# Altium PCB cjb.PcbDoc (part 1 of 2)
Units mil, origin at the board's own origin, x right, y up, seen from the top; angles counter-clockwise.
Board outline 3937.01 x 3672.01 mil, 2 copper layers (Top Layer, Bottom Layer), stack 62.8 mil thick; 137 components, 97 nets, 411 pads, 153 vias.
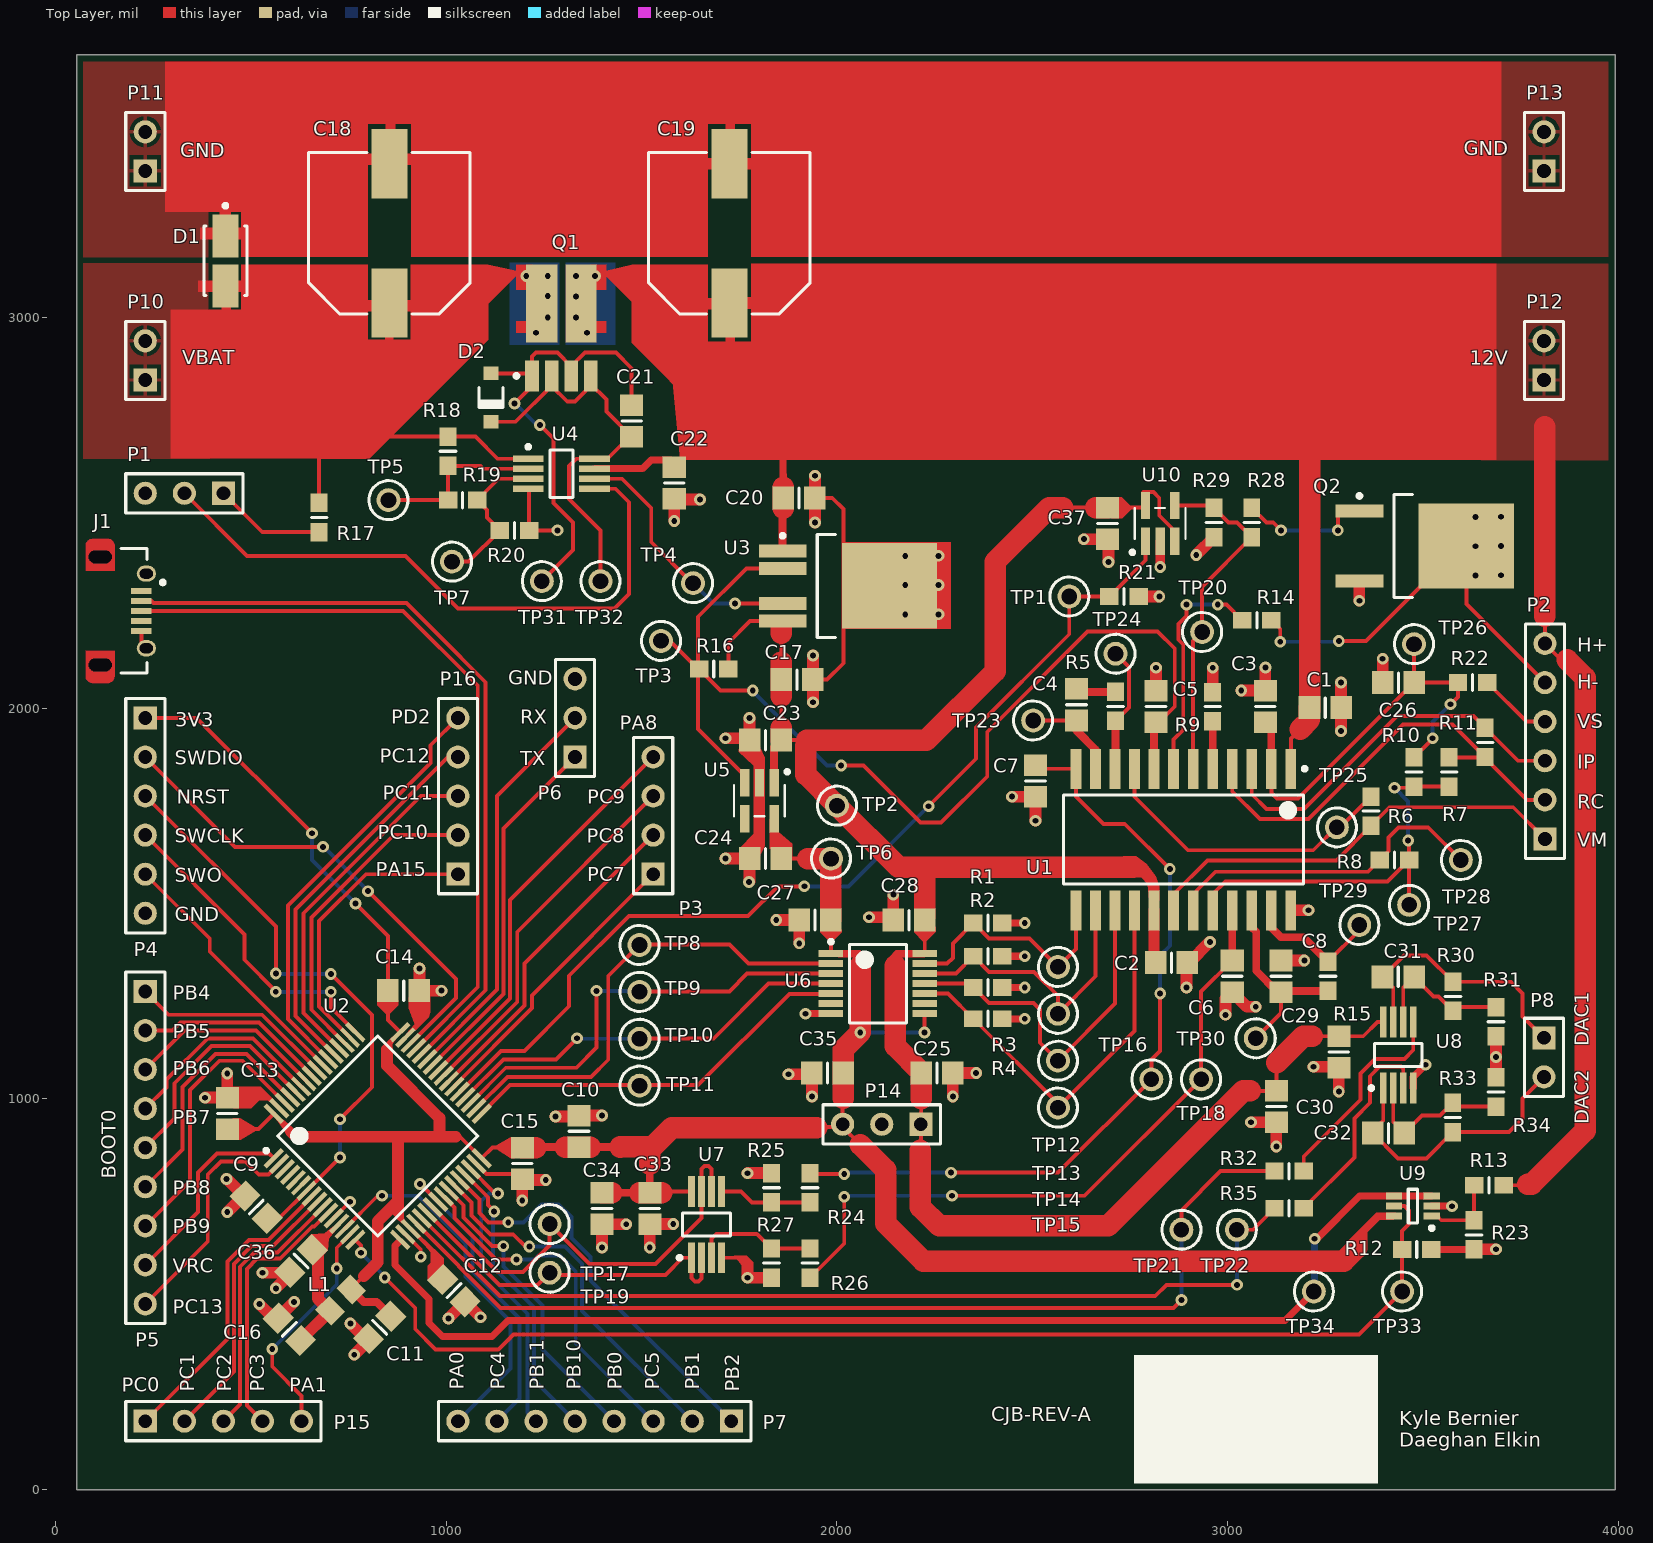
[diagram p0: Top Layer view]
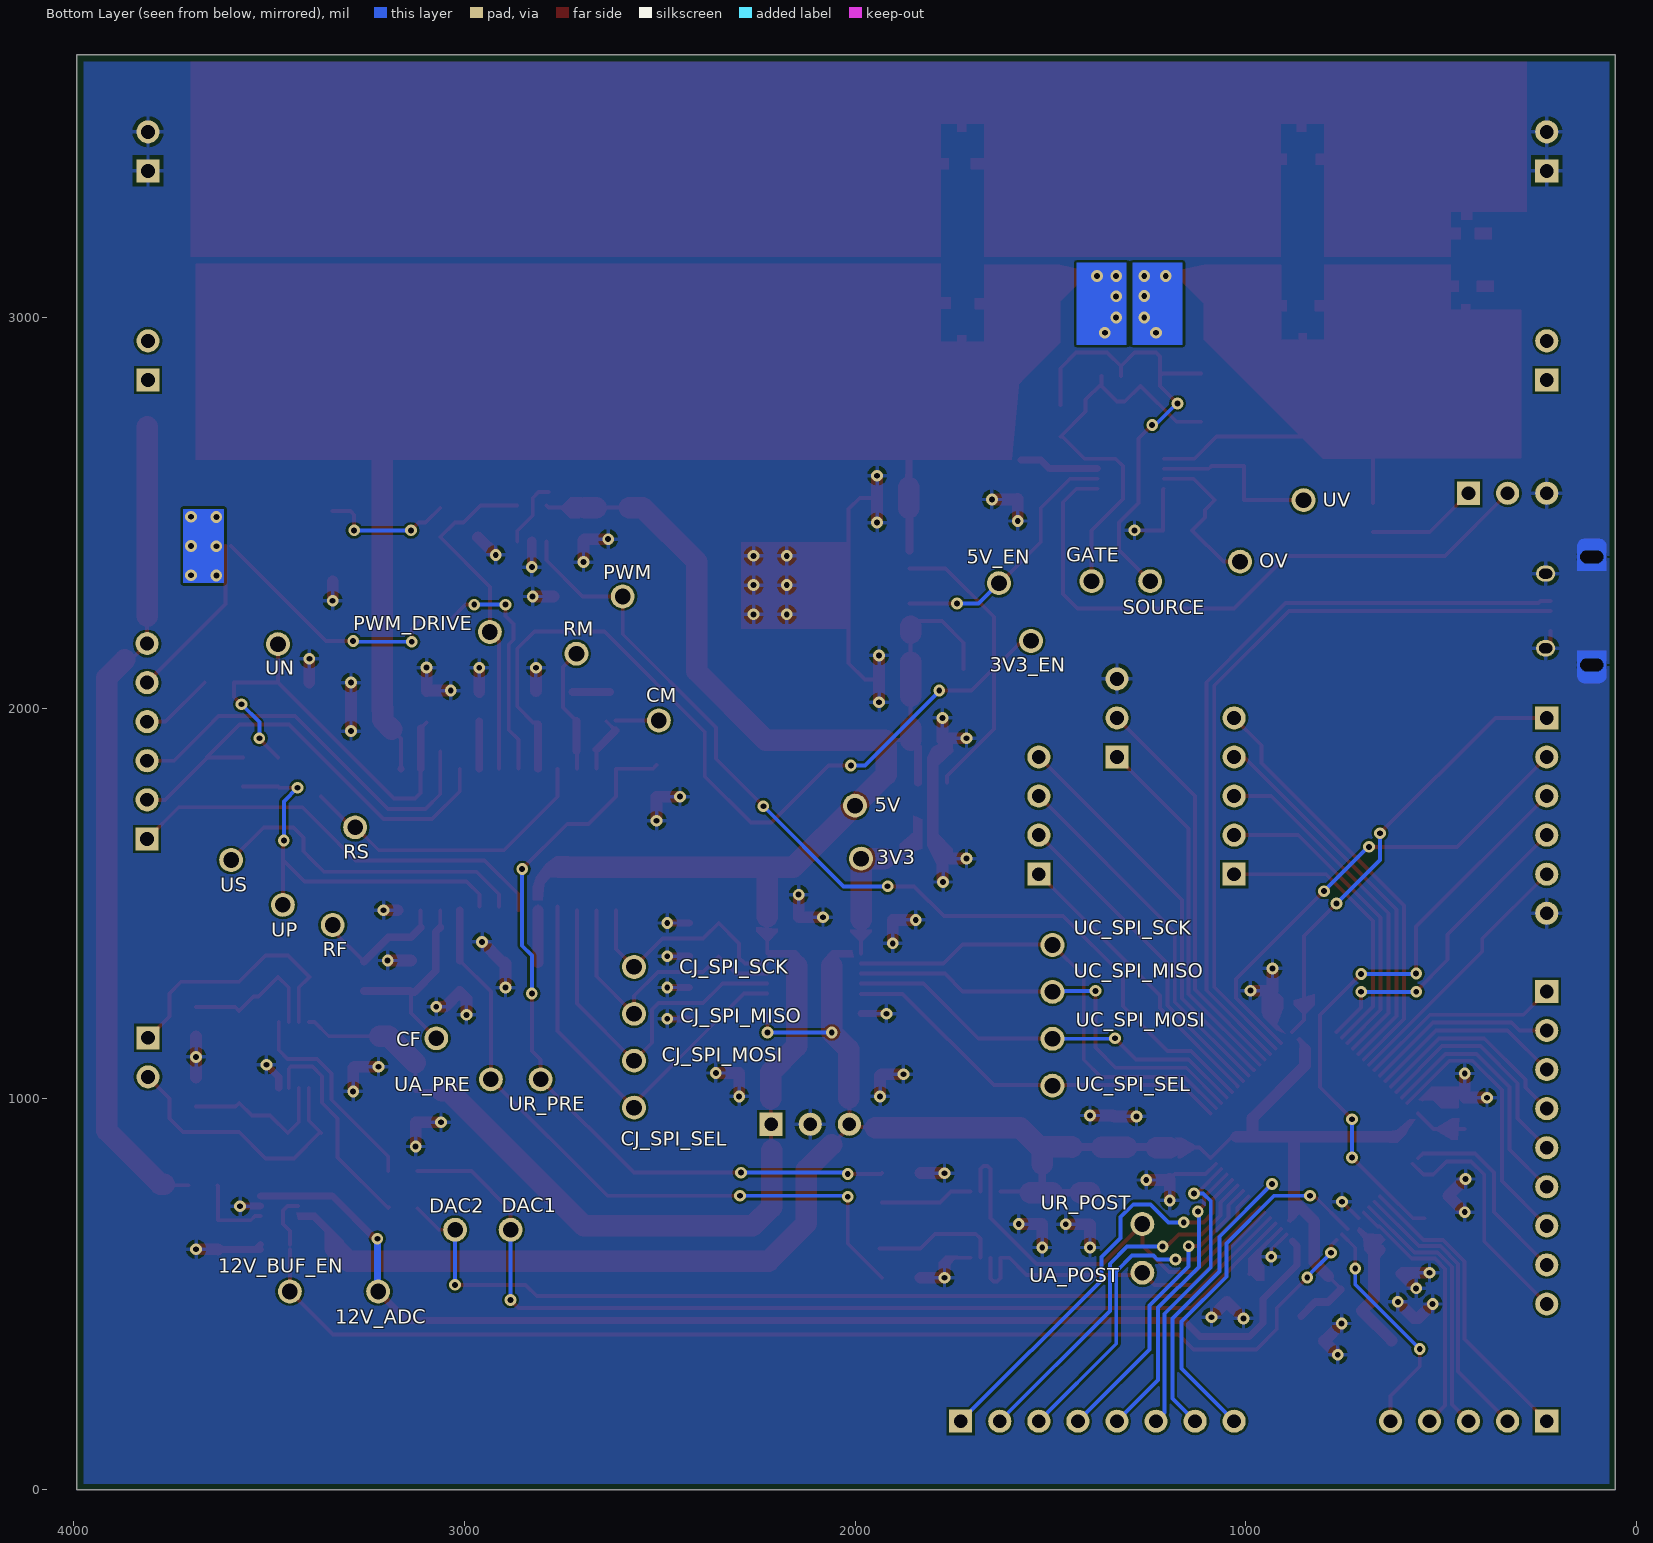
[diagram p1: Bottom Layer view, seen from below]

## Layer stack, top to bottom
Top Solder: solder mask 1, Solder Resist, Dk 3.5
Top Layer: signal copper 1.4
Dielectric 1: core 60, FR4, Dk 4.6
Bottom Layer: signal copper 1.4
Bottom Solder: solder mask 1, Solder Resist, Dk 3.5

## Board outline
55,0 55,3672.01 3992.01,3672.01 3992.01,0

## Design rules (kind name [scope] priority, off if disabled: settings)
BoardOutlineClearance [All] p1: gap=15 ignorepadtopadclearanceinfootprint=FALSE
Clearance [All] p1: gap=6 ignorepadtopadclearanceinfootprint=FALSE
DiffPairsRouting [All] p1: maxlimit=10 minlimit=10 mostfreqgap=10 toplayer_minwidth=10 toplayer_maxwidth=15 toplayer_prefwidth=10 bottomlayer_minwidth=10 bottomlayer_maxwidth=15 bottomlayer_prefwidth=10 maxuncoupledlength=500
HoleSize [All] p1: absolutevalues=TRUE maxlimit=100 minlimit=10 maxpercent=80.000 minpercent=20.000
MinimumAnnularRing [All] p1: minimumring=5
MinimumSolderMaskSliver [All] p1: minsoldermaskwidth=4
PlaneConnect [All] p1: planeconnectstyle=Direct reliefexpansion=20 reliefentries=4 reliefconductorwidth=10 reliefairgap=10
PolygonConnect [All] p1: connectstyle=Relief reliefconductorwidth=10 reliefentries=4 polygonreliefangle="90 Angle" airgapwidth=10
RoutingVias [All] p1: holewidth=6 width=16 viastyle="Through Hole" minholewidth=6 minwidth=16 maxholewidth=28 maxwidth=50
SilkToSolderMaskClearance [IsPad] p1: minsilkscreentomaskgap=6 clearancetoexposedcopper=TRUE
SolderMaskExpansion [All] p1: expansion=3
Width [All] p1: maxlimit=100 minlimit=6 preferedwidth=10 minimp=50.000000 maximp=50.000000 favimp=50.000000
25 further rules are at their usual default settings.

## Classes and differential pairs
component class U_heater: C37 Q2 R21 R28 R29 TP1 TP20 U10
net class PC[0..13]: PC0 PC1 PC2 PC3 PC4 PC5 PC7 PC8 PC9 PC10 PC11 PC12 PC13
net class PB[0..11]: PB0 PB1 PB2 PB3 PB4 PB5 PB6 PB7 PB8 PB9 PB10 PB11
net class PA[0..15]: PA0 PA1 PA4 PA5 PA8 PA13 PA14 PA15
component class U_breakout: C25 C29 C30 C31 C32 C35 P2 P3 P4 P5 P6 P7 P8 P10 P11 P12 P13 P14 P15 P16 R30 R31 R32 R33 R34 R35 TP21 TP22 U8
component class U_power: C17 C18 C19 C20 C21 C22 C23 C24 D1 D2 P1 Q1 R12 R13 R16 R17 R18 R19 R20 R23 TP2 TP3 TP4 TP5 TP6 TP7 TP31 TP32 TP33 TP34 U3 U4 U5 U9
component class U_microcontroller: C9 C10 C11 C12 C13 C14 C15 C16 C36 L1 U2
component class U_cj125: C1 C2 C3 C4 C5 C6 C7 C8 C26 C27 C28 C33 C34 R1 R2 R3 R4 R5 R6 R7 R8 R9 R10 R11 R14 R15 R22 R24 R25 R26 R27 TP8 TP9 TP10 TP11 TP12 TP13 TP14 TP15 TP16 TP17 TP18 TP19 TP23 TP24 TP25 TP26 TP27 TP28 TP29 TP30 U1 U6 U7
differential pair USB_D: +USB_D_P -USB_D_N

## Components (designator, comment, footprint, x,y, rotation, side; value= is the part's Value field where it differs from the comment)
C1 "Generic 0805 Capacitor" 0805 3250.13,2001.4 r180 top
C2 "Generic 0805 Capacitor" 0805 2857.06,1348.8 r0 top
C3 "Generic 0805 Capacitor" 0805 3096.71,2003.8 r90 top
C4 "Generic 0805 Capacitor" 0805 2613.33,2008.8 r90 top
C5 "Generic 0805 Capacitor" 0805 2817.06,2003.8 r90 top
C6 "Generic 0805 Capacitor" 0805 3012.06,1313.8 r90 top
C7 "Generic 0805 Capacitor" 0805 2508.33,1813.8 r90 top
C8 "Generic 0805 Capacitor" 0805 3137.06,1313.8 r270 top
C9 "Generic 0805 Capacitor" 0805 514,723 r315 top value=.1u
C10 "Generic 0805 Capacitor" 0805 1340,917 r270 top value=4.7u
C11 "Generic 0805 Capacitor" 0805 830,415 r45 top value=1u
C12 "Generic 0805 Capacitor" 0805 1020,509 r135 top value=100n
C13 "Generic 0805 Capacitor" 0805 440,963 r270 top value=100n
C14 "Generic 0805 Capacitor" 0805 891.49,1277 r180 top value=100n
C15 "Generic 0805 Capacitor" 0805 1195,835 r90 top value=100n
C16 "Generic 0805 Capacitor" 0805 598.74,410 r315 top value=100n
C17 "Generic 0805 Capacitor" 0805 1898.57,2073 r0 top
C18 "Generic Electrolytic Capacitor" NIC-UUX2A470MNL1GS_M 855,3215 r90 top
C19 "Generic Electrolytic Capacitor" NIC-UUX2A470MNL1GS_M 1725,3215 r90 top
C20 "Generic 0805 Capacitor" 0805 1903.57,2538 r180 top
C21 "Generic 0805 Capacitor" 0805 1475,2735 r90 top
C22 "Generic 0805 Capacitor" 0805 1584,2576 r90 top
C23 "Generic 0805 Capacitor" 0805 1817,1918 r0 top
C24 "Generic 0805 Capacitor" 0805 1817,1615 r0 top
C25 "Generic 0805 Capacitor" 0805 2256.57,1066.26 r180 top
C26 "Generic 0805 Capacitor" 0805 3437.33,2065.4 r180 top
C27 "Generic 0805 Capacitor" 0805 1943.92,1458 r0 top
C28 "Generic 0805 Capacitor" 0805 2185,1457.35 r0 top
C29 "Generic 0805 Capacitor" 0805 3285,1120 r90 top
C30 "Generic 0805 Capacitor" 0805 3125,980 r90 top
C31 "Generic 0805 Capacitor" 0805 3436.98,1312.34 r180 top
C32 "Generic 0805 Capacitor" 0805 3411.98,912.34 r180 top
C33 "Generic 0805 Capacitor" 0805 1521.35,719.57 r90 top
C34 "Generic 0805 Capacitor" 0805 1399,719.57 r90 top
C35 "Generic 0805 Capacitor" 0805 1976.57,1066.26 r0 top
C36 "Generic 0805 Capacitor" 0805 628.74,585 r45 top value=10n
C37 "Generic 0805 Capacitor" 0805 2692.61,2472.85 r90 top
D1 "SMAJ58CA" VISH-DO-214AC-2_M 435,3145 r270 top
D2 "BZT52C15T-7" DIOD-SOD123-2_V 1115,2795 r270 top
J1 "ZX62D-B-5PA8" HIRO-ZX62D-B-5PA8_V 173.74,2248.82 r270 top
L1 "MI0805K601R-10" LIRD-MI0805K601R-10-2_V 730,485 r225 top
P1 "Header 3" HDR1X3 430,2550 r180 top
P2 "Header 6" HDR1X6 3812.33,1665.4 r90 top
P3 "Header 4" HDR1X4 1530,1575 r90 top
P4 "Header 6" HDR1X6 230,1975 r270 top
P5 "Header 9" HDR1X9 230,1275 r270 top
P6 "Header 3" HDR1X3 1330,1875 r90 top
P7 "Header 8" HDR1X8 1730,175 r180 top
P8 "Header 2" HDR1X2 3810,1156.26 r270 top
P10 "Header 2" HDR1X2 230,2840 r90 top
P11 "Header 2" HDR1X2 230,3375 r90 top
P12 "Header 2" HDR1X2 3810,2840 r90 top
P13 "Header 2" HDR1X2 3810,3375 r90 top
P14 "Header 3" HDR1X3 2215,935 r180 top
P15 "Header 5" HDR1X5 230,175 r0 top
P16 "Header 5" HDR1X5 1030,1575 r90 top
Q1 "SI7288DP-T1-GE3" VISH-POWERPAKSO-8_A_V 1295,2995.35 r90 top
Q2 "SQD50N10-8M9L_GE3" TO-252AA 3505,2415 r0 top
R1 "Generic 0603 Resistor" 0603 2386.5,1450 r0 top
R2 "Generic 0603 Resistor" 0603 2386.5,1365 r0 top
R3 "Generic 0603 Resistor" 0603 2386.5,1285 r0 top
R4 "Generic 0603 Resistor" 0603 2386.5,1205 r0 top
R5 "Generic 0603 Resistor" 0603 2713.33,2004.64 r270 top
R6 "Generic 0603 Resistor" 0603 3367.33,1736.4 r90 top
R7 "Generic 0603 Resistor" 0603 3567.33,1836.4 r270 top
R8 "Generic 0603 Resistor" 0603 3427.33,1611.4 r180 top
R9 "Generic 0603 Resistor" 0603 2962.06,2003.8 r90 top
R10 "Generic 0603 Resistor" 0603 3477.33,1836.4 r270 top
R11 "Generic 0603 Resistor" 0603 3659.33,1912.4 r270 top
R12 "Generic 0603 Resistor" 0603 3484.33,614.6 r0 top
R13 "Generic 0603 Resistor" 0603 3669.33,778.91 r180 top
R14 "Generic 0603 Resistor" 0603 3075,2225 r180 top
R15 "Generic 0603 Resistor" 0603 3257.06,1313.8 r270 top
R16 "Generic 0603 Resistor" 0603 1685,2100 r0 top
R17 "Generic 0603 Resistor" 0603 675,2487.95 r90 top
R18 "Generic 0603 Resistor" 0603 1004.65,2657.6 r270 top
R19 "Generic 0603 Resistor" 0603 1042.4,2532.4 r0 top
R20 "Generic 0603 Resistor" 0603 1175,2455 r0 top
R21 "Generic 0603 Resistor" 0603 2734.92,2285.84 r180 top
R22 "Generic 0603 Resistor" 0603 3627.33,2065.4 r180 top
R23 "Generic 0603 Resistor" 0603 3630.66,652 r90 top
R24 "Generic 0603 Resistor" 0603 1931.35,772.57 r270 top
R25 "Generic 0603 Resistor" 0603 1832.92,772.57 r270 top
R26 "Generic 0603 Resistor" 0603 1931.35,579.57 r90 top
R27 "Generic 0603 Resistor" 0603 1832.92,579.57 r90 top
R28 "Generic 0603 Resistor" 0603 3062.06,2475 r90 top
R29 "Generic 0603 Resistor" 0603 2965.35,2475 r90 top
R30 "Generic 0603 Resistor" 0603 3576.98,1262.34 r90 top
R31 "Generic 0603 Resistor" 0603 3686.98,1197.34 r90 top
R32 "Generic 0603 Resistor" 0603 3157.6,815 r0 top
R33 "Generic 0603 Resistor" 0603 3576.35,952.34 r270 top
R34 "Generic 0603 Resistor" 0603 3686.98,1017.34 r270 top
R35 "Generic 0603 Resistor" 0603 3157.6,720 r0 top
TP1 "5001" KSTN-5001 2595,2285.84 r0 top
TP2 "5001" KSTN-5001 2000.5,1750.5 r0 top
TP3 "5001" KSTN-5001 1550,2172.06 r0 top
TP4 "5001" KSTN-5001 1632,2320 r0 top
TP5 "5001" KSTN-5001 852.4,2532.4 r0 top
TP6 "5001" KSTN-5001 1985,1615 r0 top
TP7 "5001" KSTN-5001 1015,2375 r0 top
TP8 "5001" KSTN-5001 1495,1393.82 r180 top
TP9 "5001" KSTN-5001 1495,1273.82 r180 top
TP10 "5001" KSTN-5001 1495,1153.82 r270 top
TP11 "5001" KSTN-5001 1495,1033.82 r270 top
TP12 "5001" KSTN-5001 2566,1337.67 r270 top
TP13 "5001" KSTN-5001 2566,1217.67 r270 top
TP14 "5001" KSTN-5001 2566,1097.67 r270 top
TP15 "5001" KSTN-5001 2566,977.67 r270 top
TP16 "5001" KSTN-5001 2805,1050 r90 top
TP17 "5001" KSTN-5001 1265,679.57 r90 top
TP18 "5001" KSTN-5001 2932.4,1050 r90 top
TP19 "5001" KSTN-5001 1265,555 r90 top
TP20 "5001" KSTN-5001 2935,2195 r180 top
TP21 "5001" KSTN-5001 2882,665 r90 top
TP22 "5001" KSTN-5001 3024,665 r90 top
TP23 "5001" KSTN-5001 2502.33,1968.45 r90 top
TP24 "5001" KSTN-5001 2713.33,2139.28 r90 top
TP25 "5001" KSTN-5001 3280,1695 r90 top
TP26 "5001" KSTN-5001 3477.33,2163.8 r90 top
TP27 "5001" KSTN-5001 3464.73,1496.4 r90 top
TP28 "5001" KSTN-5001 3597.33,1611.4 r90 top
TP29 "5001" KSTN-5001 3337.33,1445 r180 top
TP30 "5001" KSTN-5001 3072.06,1155 r90 top
TP31 "5001" KSTN-5001 1245,2325 r90 top
TP32 "5001" KSTN-5001 1395,2325 r90 top
TP33 "5001" KSTN-5001 3446.93,507 r90 top
TP34 "5001" KSTN-5001 3221,507 r90 top
U1 "CJ125" SOIC-24 2887.06,1663.8 r270 top
U2 "STM32L475RCT3" STM-LQFP64_L 825,905 r45 top
U3 "TPS7A6150QKVURQ1" KVU0005A_M 2028.57,2313 r0 top
U4 "LT4367HMS" MSOP8_M 1295,2600 r0 top
U5 "TLV71333PDBVR" DBV5-M 1802,1763 r270 top
U6 "TXB0104PWR" PW0014A_M 2105,1295 r0 top
U7 "MCP6L02T-E/MS" MSOP8_M 1666.35,678.01 r90 top
U8 "MCP6L02T-E/MS" MSOP8_M 3436.98,1112.34 r90 top
U9 "LMV341MG/NOPB" DCK0006A_M 3474.33,725.33 r180 top
U10 "UCC27519DBVT" DBV5-M 2827.61,2472.85 r90 top

## Footprints (in the part's own frame and the unit in brackets; to place one, negate y for a bottom-side part, rotate by r counter-clockwise, add the part's x,y. Pads: shape width x height; smd on the part's side, far side on the other; paste and mask are expansions set on the pad)
0603 [mm] "0603 - Based on VIshey Recommendations"
  rect 1.2x1.1 smd mask+0.1: 1(-0.95,0) 2(0.95,0)
  silkscreen extent 0,-0.51 0,0.51, body extent -0.8,-0.4 0.8,0.4, height 0.76
0805 [mm] "0805 - Based on VIshey Recommendations"
  rect 1.4x1.5 smd mask+0.1: 1(-1.025,0) 2(1.025,0)
  silkscreen extent 0,-0.64 0,0.64, body extent -1,-0.63 1,0.63, height 1.02
DBV5-M [mil]
  rect 70x24 smd paste+0 mask+2: 1(-46,37.4) 2(-46,0) 3(-46,-37.4) 4(46,-37.4) 5(46,37.4)
  silkscreen extent -78,-65 40,75, body extent -59,-60 59,60, height 57
DCK0006A_M [mm] "SOT23, 6-Leads, Body 2.15x1.4mm, Pitch 0.65mm, IPC Low Density"
  rect 1.05x0.45 smd mask+0.046: 1(-1.225,0.65) 2(-1.225,0) 3(-1.225,-0.65) 4(1.225,-0.65) 5(1.225,0) 6(1.225,0.65)
  silkscreen extent -1.35,-1.1 0.3,1.55, body extent -1.14,-1 1.14,1, height 0.94
DIOD-SOD123-2_V [mm] "SOD123, 2-Leads, Body 2.7x1.55mm, Height 1.45mm"
  rect 0.9x0.95 smd mask+0.076: 1(-1.575,0) 2(1.575,0)
  silkscreen extent -0.64,-0.82 0.64,0.77, body extent -1.35,-0.77 1.35,0.77, height 1.45
HDR1X2 [mm] "Connector; Header; 2 Position"
  rect 1.5x1.5 hole 0.9: 1(0,0)
  round 1.5 hole 0.9: 2(2.54,0)
  silkscreen extent -1.27,-1.27 3.81,1.27
HDR1X3 [mm] "Connector; Header; 3 Position"
  rect 1.5x1.5 hole 0.9: 1(0,0)
  round 1.5 hole 0.9: 2(2.54,0) 3(5.08,0)
  silkscreen extent -1.27,-1.27 6.35,1.27
HDR1X4 [mm] "Connector; Header; 4 Position"
  rect 1.5x1.5 hole 0.9: 1(0,0)
  round 1.5 hole 0.9: 2(2.54,0) 3(5.08,0) 4(7.62,0)
  silkscreen extent -1.27,-1.27 8.89,1.27
HDR1X5 [mm] "Connector; Header; 5 Position"
  rect 1.5x1.5 hole 0.9: 1(0,0)
  round 1.5 hole 0.9: 2(2.54,0) 3(5.08,0) 4(7.62,0) 5(10.16,0)
  silkscreen extent -1.27,-1.27 11.43,1.27
HDR1X6 [mm] "Connector; Header; 6 Position"
  rect 1.5x1.5 hole 0.9: 1(0,0)
  round 1.5 hole 0.9: 2(2.54,0) 3(5.08,0) 4(7.62,0) 5(10.16,0) 6(12.7,0)
  silkscreen extent -1.27,-1.27 13.97,1.27
HDR1X8 [mm] "Connector; Header; 8 Position"
  rect 1.5x1.5 hole 0.9: 1(0,0)
  round 1.5 hole 0.9: 2(2.54,0) 3(5.08,0) 4(7.62,0) 5(10.16,0) 6(12.7,0) 7(15.24,0) 8(17.78,0)
  silkscreen extent -1.27,-1.27 19.05,1.27
HDR1X9 [mm] "Connector; Header; 9 Position"
  rect 1.5x1.5 hole 0.9: 1(0,0)
  round 1.5 hole 0.9: 2(2.54,0) 3(5.08,0) 4(7.62,0) 5(10.16,0) 6(12.7,0) 7(15.24,0) 8(17.78,0) 9(20.32,0)
  silkscreen extent -1.27,-1.27 21.59,1.27
HIRO-ZX62D-B-5PA8_V [mm] "SMD, 5-Leads, Body 7.5x5mm, Pitch 0.65mm"
  rect 0.4x1.35 smd mask+0.051: 1(-1.3,1.175) 2(-0.65,1.175) 3(0,1.175) 4(0.65,1.175) 5(1.3,1.175)
  oval 1.05x1.25 hole 0.65 slot 0.85 at 90 deg mask+0.076: 6(-2.425,1.5) 7(2.425,1.5)
  oval 0.525x1.2 hole 0.825 slot 1.5 at 90 deg: 8(-3.512,-1.5) 9(3.512,-1.5)
  Top Layer region: 4.2,-2.45 4.391,-2.412 4.554,-2.304 4.662,-2.141 4.7,-1.95 4.7,-1.95 4.7,-1.05 4.662,-0.859 4.554,-0.696 4.391,-0.588 4.2,-0.55 4.2,-0.55 2.6,-0.55 2.6,-2.45
  Top Layer region: -4.2,-2.45 -4.391,-2.412 -4.554,-2.304 -4.662,-2.141 -4.7,-1.95 -4.7,-1.95 -4.7,-1.05 -4.662,-0.859 -4.554,-0.696 -4.391,-0.588 -4.2,-0.55 -4.2,-0.55 -2.6,-0.55 -2.6,-2.45
  Bottom Layer region: 4.2,-2.45 4.391,-2.412 4.554,-2.304 4.662,-2.141 4.7,-1.95 4.7,-1.95 4.7,-1.05 4.662,-0.859 4.554,-0.696 4.391,-0.588 4.2,-0.55 4.2,-0.55 2.6,-0.55 2.6,-2.45
  Bottom Layer region: -4.2,-2.45 -4.391,-2.412 -4.554,-2.304 -4.662,-2.141 -4.7,-1.95 -4.7,-1.95 -4.7,-1.05 -4.662,-0.859 -4.554,-0.696 -4.391,-0.588 -4.2,-0.55 -4.2,-0.55 -2.6,-0.55 -2.6,-2.45
  silkscreen extent -4.05,-0.15 4.05,2.69, body extent -4.05,-4.25 4.05,1.55, height 2.75
KSTN-5001 [mm] "Test Point, Through Hole, Dia 2.54mm"
  round 1.55 hole 1.016: 1(0,0)
  silkscreen extent -1.27,-1.27 1.27,1.27, body extent -1.24,-1.24 1.25,1.25, height 4.62
KVU0005A_M [mm] "DPAK, 5-Leads, Body 6.22x6.7mm, Pitch 1.14mm, IPC Low Density"
  rect 3.1x0.85 smd mask+0.076: 1(-4.25,2.28) 2(-4.25,1.14) 4(-4.25,-1.14) 5(-4.25,-2.28)
  rect 6.2x5.55 smd mask+0.076: 6(2.7,0)
  silkscreen extent -4.37,-3.35 -0.8,3.38, body extent -4.77,-3.25 5.13,3.25, height 2.32
LIRD-MI0805K601R-10-2_V [mm] "Chip Bead, 2-Leads, Body 2.2 x1.45 mm"
  rect 1.285x1.47 smd mask+0.076: 1(-0.973,0) 2(0.973,0)
  body extent -1.1,-0.72 1.1,0.73, height 1.1
MSOP8_M [mm] "TSOP, 8-Leads, Body 3x3mm, Pitch 0.65mm, IPC Low Density"
  rect 2x0.45 smd mask+0.046: 1(-2.15,0.975) 2(-2.15,0.325) 3(-2.15,-0.325) 4(-2.15,-0.975) 5(2.15,-0.975) 6(2.15,-0.325) 7(2.15,0.325) 8(2.15,0.975)
  silkscreen extent -2.27,-1.55 0.75,1.87, body extent -1.55,-1.55 1.55,1.55, height 1.1
NIC-UUX2A470MNL1GS_M [mm] "Aluminum Electrolytic Capacitor, Body 10.5x10.5mm, IPC Low Density"
  rect 4.5x2.35 smd mask+0.076: 1(-4.525,0) 2(4.525,0)
  silkscreen extent -5.25,-5.25 5.25,5.25, body extent -5.65,-5.25 5.65,5.25, height 10.8
PW0014A_M [mm] "SOP, 14-Leads, Body 5.1x4.5mm, Pitch 0.65mm, IPC Low Density"
  rect 1.6x0.45 smd mask+0.046: 1(-3.05,1.95) 2(-3.05,1.3) 3(-3.05,0.65) 4(-3.05,0) 5(-3.05,-0.65) 6(-3.05,-1.3) 7(-3.05,-1.95) 8(3.05,-1.95) 9(3.05,-1.3) 10(3.05,-0.65) 11(3.05,0) 12(3.05,0.65) 13(3.05,1.3) 14(3.05,1.95)
  silkscreen extent -3.17,-2.55 1.85,2.85, body extent -3.21,-2.5 3.21,2.5, height 1
SOIC-24 [mm] "SOIC, 24-Leads, Body 15.4x7.5mm, Pitch 1.27mm, IPC Low Density"
  rect 2.6x0.7 smd mask+0.076: 1(-4.6,6.985) 2(-4.6,5.715) 3(-4.6,4.445) 4(-4.6,3.175) 5(-4.6,1.905) 6(-4.6,0.635) 7(-4.6,-0.635) 8(-4.6,-1.905) 9(-4.6,-3.175) 10(-4.6,-4.445) 11(-4.6,-5.715) 12(-4.6,-6.985) 13(4.6,-6.985) 14(4.6,-5.715) 15(4.6,-4.445) 16(4.6,-3.175) 17(4.6,-1.905) 18(4.6,-0.635) 19(4.6,0.635) 20(4.6,1.905) 21(4.6,3.175) 22(4.6,4.445) 23(4.6,5.715) 24(4.6,6.985)
  silkscreen extent -4.72,-7.8 2.9,8.01, body extent -5.26,-7.72 5.26,7.72, height 1.7
STM-LQFP64_L [mm] "QFP, 64-Leads, Body 10x10mm, Pitch 0.5mm, IPC High Density"
  rect 1.6x0.3 smd mask+0.038: 1(-5.8,3.75) 2(-5.8,3.25) 3(-5.8,2.75) 4(-5.8,2.25) 5(-5.8,1.75) 6(-5.8,1.25) 7(-5.8,0.75) 8(-5.8,0.25) 9(-5.8,-0.25) 10(-5.8,-0.75) 11(-5.8,-1.25) 12(-5.8,-1.75) 13(-5.8,-2.25) 14(-5.8,-2.75) 15(-5.8,-3.25) 16(-5.8,-3.75) 33(5.8,-3.75) 34(5.8,-3.25) 35(5.8,-2.75) 36(5.8,-2.25) 37(5.8,-1.75) 38(5.8,-1.25) 39(5.8,-0.75) 40(5.8,-0.25) 41(5.8,0.25) 42(5.8,0.75) 43(5.8,1.25) 44(5.8,1.75) 45(5.8,2.25) 46(5.8,2.75) 47(5.8,3.25) 48(5.8,3.75)
  rect 0.3x1.6 smd mask+0.038: 17(-3.75,-5.8) 18(-3.25,-5.8) 19(-2.75,-5.8) 20(-2.25,-5.8) 21(-1.75,-5.8) 22(-1.25,-5.8) 23(-0.75,-5.8) 24(-0.25,-5.8) 25(0.25,-5.8) 26(0.75,-5.8) 27(1.25,-5.8) 28(1.75,-5.8) 29(2.25,-5.8) 30(2.75,-5.8) 31(3.25,-5.8) 32(3.75,-5.8) 49(3.75,5.8) 50(3.25,5.8) 51(2.75,5.8) 52(2.25,5.8) 53(1.75,5.8) 54(1.25,5.8) 55(0.75,5.8) 56(0.25,5.8) 57(-0.25,5.8) 58(-0.75,5.8) 59(-1.25,5.8) 60(-1.75,5.8) 61(-2.25,5.8) 62(-2.75,5.8) 63(-3.25,5.8) 64(-3.75,5.8)
  silkscreen extent -5.92,-4.6 4.6,4.6, body extent -6,-6 6,6, height 1.6
TO-252AA [mm] "TO-252AA based on IRLR2908"
  rect 3.1x0.85 smd mask+0.076: 1(-4.25,2.28) 3(-4.25,-2.28)
  rect 6.2x5.55 smd mask+0.076: 4(2.7,0)
  silkscreen extent -4.37,-3.35 -0.8,3.38, body extent -4.77,-3.25 5.13,3.25, height 2.32
VISH-DO-214AC-2_M [mm] "DO-214AC, 2-Leads, Body 4.5x2.79mm, IPC Low Density"
  rect 2.8x1.7 smd mask+0.076: 1(-1.625,0) 2(1.625,0)
  silkscreen extent -3.7,-1.4 2.25,1.4, body extent -2.25,-1.39 2.25,1.4, height 2.29
VISH-POWERPAKSO-8_A_V [mil] "SMD, 8-Leads, Body 6.15x5.155mm, Pitch 1.27mm"
  rect 80x35 smd mask+3: 1(-145,75) 2(-145,25) 3(-145,-25) 4(-145,-75)
  rect 200x80 smd mask+3: 5(40,-50) 6(40,50)
  Top Layer region: -35,-115 -5,-115 -5,-77.5 -35,-77.5
  Top Layer region: -35,75 -5,75 -5,115 -35,115
  Top Layer region: 75,75 140,75 140,115 75,115
  Top Layer region: 75,-115 140,-115 140,-75 75,-75
  silkscreen extent -150,110 -140,120, body extent -141,-100 101,101, height 46

## Part data
C1 C2 C3 C4 C5 C6 C7 C8 C9 C10 C11 C12 C13 C14 C15 C16 C17 C20 C21 C22 C23 C24 C25 C26 C27 C28 C29 C30 C31 C32 C33 C34 C35 C36 C37: library part C_0805
C18 C19: library part C_can, "Generic PCAP_10x10 Can Aluminum Electrolytic Capacitor"
D1: "Transient Voltage Suppressor, 6.40 to 231 V, 58 V Stand-off Voltage, Bi-Directional, -55 to 155 degC, 2-pin DO-214AC, Pb-Free, Tape and Reel", Manufacturer="Vishay Semiconductor", Operating Junction and Storage Temperature Range="-55 to 150 degC", PartNumber=SMAJ58CA-E3/5A, Supplier Part Number 1=SMAJ58CALFCT-ND, ComponentLink1Description="Manufacturer URL", ComponentLink1URL=http://www.vishay.com/, ComponentLink2Description=Datasheet, ComponentLink2URL=http://www.vishay.com/docs/88390/smaj50a.pdf, ComponentLink3Description="Package Specification", ComponentLink3URL=http://www.vishay.com/docs/88390/smaj50a.pdf, DatasheetVersion=12/8/2013, ID (uA)=2, IFSM="40 A", Mounting Technology="Surface Mount", PackageDescription="2-Pin DO-214AC (SMA), Body 4.245 x 2.665 mm", PackageReference=DO-214AC-2, Packing="Tape and Reel", PPPM (W)="400, 300", RoHS=TRUE, Supplier 1=Digi-Key, VBR Bi-Directional (V)="6.4 to 231", VWM (V)=58
D2: library part BZT52C15T, "Zener Diode 15V 300mW ±6% Surface Mount SOD-523", Manufacturer="Diodes Inc", Maximum Reverse Current="0.1 uA", Operating Temperature="-65 to 150 degC", PartNumber=BZT52C16-7-F, Power Max="500 mW", Voltage Zener="16 V Typ.", ComponentLink1Description="Manufacturer URL", ComponentLink1URL=http://www.diodes.com/, ComponentLink2Description=Datasheet, ComponentLink2URL=http://www.diodes.com/datasheets/ds18004.pdf, ComponentLink3Description="Package Specification", ComponentLink3URL=http://www.diodes.com/datasheets/ap02002.pdf, DatasheetVersion="Rev. 37-2", Maximum Zener Impedance f="1 kHz ZZK=200 Ohm", Mounting Technology="Surface Mount", PackageDescription="2-Pin SOD123, Body 2.7 x 1.55 mm, Height 1.45 mm", PackageReference=SOD123, PackageVersion="Rev. 79", Packing="Tape and Reel", RoHS=TRUE, Tol V="5.56% Typ."
J1: library part Micro_USB, "Micro-USB Connector Meeting USB 2.0 Standard, -30 to 85 degC, 5-Pin SMD, RoHS, Tape and Reel", Color=Black, Current Rating=1A, Manufacturer=HiroseElectric, Operating Temperature Range=-30Cto+85C, Package Description="5-Pin Surface Mount Device, Body 7.5 x 5 mm, Pitch 0.65 mm", Voltage Rating=30V, Brand=HiroseConnector, Connector Type=Receptacle, Contact Material=CopperAlloy, Contact Plating=Gold, Datasheet URL=https://datasheet.ciiva.com/22825/0900766b8118f7b1-22825836.pdf, Datasheet Version=08/2010, Factory Pack Quantity=2000, Gender=Male, Manufacturer URL=https://www.hirose.com, Mounting Angle=Right, Mounting Technology=SurfaceMount, Number of Contacts=5Contact, Number of Ports=1Port, Package Reference=ZX62D-B-5PA8, Packaging=Reel, Product=MicroUSBTypeBConnectors, Product Category=USBConnectors, RoHS=Details, Series=ZX, Shell Plating=Tin, Standard=USB2.0, Termination Style=Solder
L1: library part MI0805K, "Chip Bead for Power Filtering, 1500 mA, 600 Ohm, -40 to 125 degC, 0805 (2012 Metric), RoHS, Tape and Reel", Current Rating (Max)=1.5A, DC Resistance (DCR) (Max)=100mOhm, Impedance @ Frequency=600Ohm@100MHz, Manufacturer=Laird, Operating Temperature=-40degC~125degC, Package / Case=0805(2012Metric), Package Description="2-Pin Surface Mount Device, Body 2 x 1.25 mm", Package Reference=MI0805K601R-10-2, Ratings=-, Standard Package=1, Catalog Drawings=(HI,HZ,LI,MI)0805Series_1.10mmMax.Height, Category=Filters, Datasheet URL=https://datasheet.ciiva.com/3082/mi0805k601r-10-a-vp-3082219.pdf, Datasheet Version="Rev. A, 01/2004", Family=FerriteBeadsandChips, Filter Type=PowerLine, Height (Max)="0.043\"(1.10mm)", Kits=240-2227-ND-KITEMIFERRITEBEADCHIPSMD, Manufacturer URL=https://www.lairdtech.com, Mounting Type=SurfaceMount, Number of Lines=1, Online Catalog=MISeries, Other Names=240-2390-1, Packaging=CutTape(CT), Series=MI, Size / Dimension="0.079\"Lx0.049\"W(2.00mmx1.25mm)"
P1 P6 P14: "Header, 3-Pin", LatestRevisionDate=17-Jul-2002, LatestRevisionNote="Re-released for DXP Platform.", Publisher="Altium Limited"
P2 P4: "Header, 6-Pin", LatestRevisionDate=17-Jul-2002, LatestRevisionNote="Re-released for DXP Platform.", Publisher="Altium Limited"
P3: "Header, 4-Pin", LatestRevisionDate=17-Jul-2002, LatestRevisionNote="Re-released for DXP Platform.", Publisher="Altium Limited"
P5: "Header, 9-Pin", LatestRevisionDate=17-Jul-2002, LatestRevisionNote="Re-released for DXP Platform.", Publisher="Altium Limited"
P7: "Header, 8-Pin", LatestRevisionDate=17-Jul-2002, LatestRevisionNote="Re-released for DXP Platform.", Publisher="Altium Limited"
P8 P10 P11 P12 P13: "Header, 2-Pin", LatestRevisionDate=17-Jul-2002, LatestRevisionNote="Re-released for DXP Platform.", Publisher="Altium Limited"
P15 P16: "Header, 5-Pin", LatestRevisionDate=17-Jul-2002, LatestRevisionNote="Re-released for DXP Platform.", Publisher="Altium Limited"
Q1: library part SI7288DP, "Dual N-Channel (D-S) MOSFET, 40 V, 20 A, -55 to 150 degC, 8-Pin POWERPAKSO-8, RoHS, Tape and Reel", Current - Continuous Drain (Id) @ 25°C=20A, Drain to Source Voltage (Vdss)=40V, Input Capacitance (Ciss) @ Vds=565pF@20V, Manufacturer=Vishay, Package / Case=PowerPAK®SO-8Dual, Package Description="8-Pin Surface Mount Device, Body 6.15 x 5.155 mm, Pitch 1.27 mm", Package Reference=POWERPAKSO-8, Power - Max=15.6W, Standard Package=1, Category=DiscreteSemiconductorProducts, Datasheet URL=http://www.vishay.com/docs/65366/si7288dp.pdf, Datasheet Version="Rev. A, 10/2009", Family=FETs-Arrays, FET Feature=Standard, FET Type=2N-Channel(Dual), Gate Charge (Qg) @ Vgs=15nC@10V, Manufacturer URL=http://www.vishay.com/, Mounting Technology=SurfaceMount, Mounting Type=SurfaceMount, Online Catalog=N-ChannelStandardFETs, Other Names=SI7288DP-T1-GE3DKR, Packaging=Digi-Reel®, PCN Assembly/Origin=MultipleFabracationChanges09/Jul/2014, Rds On (Max) @ Id, Vgs=19mOhm@10A,10V, Series=TrenchFET®, Supplier Device Package=PowerPAK®SO-8Dual, Vgs(th) (Max) @ Id=2.8V@250µA
Q2: library part SQD50N10, "N-Channel 100V 50A (Tc) 136W (Tc) Surface Mount TO-252", Package / Case=TO-252AA-3, Package Reference=TO-252AA, Supplier Part Number 1=SQD50N10-8M9L_GE3CT-ND, Product Category=MOSFET, Supplier 1=Digi-Key, Transistor Polarity=N-Channel
R1 R2 R3 R4 R5 R6 R7 R8 R9 R10 R11 R12 R13 R14 R15 R16 R17 R18 R19 R20 R21 R22 R23 R24 R25 R26 R27 R28 R29 R30 R31 R32 R33 R34 R35: library part R_0603
TP1 TP2 TP3 TP4 TP5 TP6 TP7 TP8 TP9 TP10 TP11 TP12 TP13 TP14 TP15 TP16 TP17 TP18 TP19 TP20 TP21 TP22 TP23 TP24 TP25 TP26 TP27 TP28 TP29 TP30 TP31 TP32 TP33 TP34: library part TP5001, "Test Point, Black, 1-Pin THD, RoHS, Bulk", Alternate Color="5004K-ND / -TESTPOINTPCMINI.040\"DYELLOW / 5003K-ND / -TESTPOINTPCMINI.040\"DORANGE / 5002K-ND / -TESTPOINTPCMINI.040\"DWHITE / 5000K-ND / -TESTPOINTPCMINI.040\"DRED", Color=Black, Manufacturer=Keystone, Standard Package=100, Catalog Drawings=5000Series, Category=TestandMeasurement, Datasheet URL=https://ciiva.com/datasheet-click-2917627?src=ciiva&sig=bd195616, Datasheet Version="Rev. G, 12/2008", Family=TestPoints, Kits="DKTGRS232C-KIT-ND / -TTLCONVERTER", Manufacturer URL=http://www.keyelco.com/, Material=Base,Nylon46,UL94V-0, Mounting Type="0.040\"(1.02mm)HoleDiameter", Online Catalog=ColorCodedTestPoints, Other Names=5001K, Packaging=Bulk, RoHS Information=RoHSComplianceStatement, Series=THM, Terminal="0.010\"x0.020\"(0.25mmx0.51mm)PhosphorBronzeWire,SilverPlated", Type=PCTestPoint,Miniature
U1: "5V 2Mbaud SMT Lambda Probe Interface IC - SOIC-24", Package Reference=SOIC-24, Supplier Part Number 1=0272240104, Supplier 1="Future Electronics"
U2: "Ultra-Low-Power ARM Cortex-M4 32-bit MCU+FPU, 256 KB Flash, 128 KB Internal RAM, 51 I/Os, 64-Pin LQFP, -40 to 125 degC, Tray", I/Os (High Current)=51, Operating Frequency(F) (Processor speed) (MHz)=80, Package=LQFP64, Package Description="64-Pin Low-profile Quad Flat Package, Body 10 x 10 mm, Pitch 0.5 mm", Supplier Part Number 1=497-16840-ND, Supply Voltage(Vcc) min (V)=1.71, ComponentLink1Description=Datasheet, ComponentLink1URL=http://www.st.com/content/ccc/resource/technical/document/datasheet/90/51/73/d2/53/60/4f/5f/DM00172872.pdf/files/DM00172872.pdf/jcr:content/translations/en.DM00172872.pdf, Core="ARM Cortex-M4", D/A Converter=2, DatasheetVersion="Rev. 4", FLASH Size (Prog) (kB)=256, Internal RAM Size (kB)=128, Mounting Technology="Surface Mount", Packing=Tray, Supplier 1=Digi-Key
U3: library part TPS7A6150-Q1, "Single Output Automotive LDO, 300 mA, Fixed 5 V Output, 4 to 40 V Input, with Ultra-Low IQ, 5-pin PFM (KVU), -40 to 125 degC, Green (RoHS & no Sb/Br)", Manufacturer="Texas Instruments", Supplier Part Number 1=296-36856-6-ND, Accuracy(%)=2, Code_JEDEC=TO-252, ComponentLink1Description="Manufacturer URL", ComponentLink1URL=http://www.ti.com/, ComponentLink2Description=Datasheet, ComponentLink2URL=http://www.ti.com/general/docs/lit/getliterature.tsp?genericPartNumber=TPS7A6150-Q1&fileType=pdf, ComponentLink3Description="Package Specification", ComponentLink3URL=http://www.ti.com/lit/ml/mpsf019/mpsf019.pdf, DatasheetVersion=SLVSA62G, Eco-Plan="Green (RoHS & no Sb/Br)", Fixed Output Options(V)=5, Iout(Max)(A)=0.3, Iq(Typ)(mA)=0.02, Mounting Technology="Surface Mount", PackageDescription="5-Pin Plastic Flange Mount, Body 6.1 x 6.6 mm, Pitch 1.14 mm", PackageReference=KVU0005A, PackageVersion=4205521-3/D, PartNumber=TPS7A6150QKVURQ1, SubFamily="Single Channel LDO", Supplier 1=Digi-Key, Vdo(Typ)(mV)=300, Vin(Max)(V)=40, Vin(Min)(V)=4, Vout Adj(Max)(V)=5, Vout Adj(Min)(V)=5
U4: library part LT4367, "100V Overvoltage, Undervoltage and Reverse Supply Protection Controller", ComponentLink1Description="Manufacturer URL", ComponentLink1URL=http://www.linear.com/, ComponentLink2Description=Datasheet, ComponentLink2URL=http://cds.linear.com/docs/en/datasheet/4356fa.pdf, ComponentLink3Description="Package Specification", ComponentLink3URL=http://cds.linear.com/docs/en/packaging/05081661_F_MS.pdf
U5: "REG LINEAR 3.3V 150MA SOT23-5", Supplier Part Number 1=296-35591-6-ND, Manufacturer_Part_Number=TLV71333PDBVR, Supplier 1=Digi-Key
U6: library part TXB0104, "4-Bit Bidirectional Voltage-Level Translator with Automatic Direction Sensing and +/- 15-kV ESD Protection, -40 to 85 degC, 14-Pin TSSOP (PW), Green (RoHS & Sb/Br), Tape and Reel", Manufacturer="Texas Instruments", Operating Temperature=-40°C~85°C, Package / Case="14-TSSOP(0.173\",4.40mmWidth)", Package Description="14-Pin Thin Shrink Small Outline Package, Body 5 x 4.4 mm, Pitch 0.65 mm", Package Reference=PW14, Standard Package=1, Supplier Device Package=14-TSSOP, Voltage - Supply=1.2V~3.6V,1.65V~5.5V, Category=IntegratedCircuits(ICs), Data Rate=100Mbps, Datasheet URL=http://www.ti.com/general/docs/lit/getliterature.tsp?genericPartNumber=TXB0104&fileType=pdf, Datasheet Version="Rev. G, 11/2014", Differential - Input=Output:No/No, Dynamic Catalog=TXBSeries, Family=Logic-Translators, Input Type=Logic, Logic Function=Translator,Bidirectional, Manufacturer URL=http://www.ti.com/, Mounting Technology=SurfaceMount, Number of Bits=4, Number of Channels=4, Number of Outputs/Channel=1, Other Names=296-21929-6, Output Type=Logic, Packaging=Digi-Reel®, Product Training Modules=VoltageLevelTranslation, Propagation Delay (Max)=4ns, Series=-
U7 U8: library part MCP6L02, "1 MHz, 85 μA Dual Op Amp, 8-Pin MSOP, Extended Temperature Range, Tape and Reel", ComponentLink1Description="Manufacturer URL", ComponentLink1URL=http://www.microchip.com/, ComponentLink2Description=Datasheet, ComponentLink2URL=http://ww1.microchip.com/downloads/en/DeviceDoc/22140b.pdf, ComponentLink3Description="Package Specification", ComponentLink3URL=http://www.microchip.com/stellent/groups/techpub_sg/documents/packagingspec/en012702.pdf, DatasheetVersion="revB, Sep-2011", PackageDescription="8-Lead Plastic Micro Small Outline Package (MS) [MSOP]", PackageReference=MSOP-MS8, PackageVersion="revBB, Aug-2009", RevisionNote="URLs added. DatasheetVersion updated."
U9: library part LMV341, "Single with Shutdown/Dual/Quad General Purpose, 2.7V, Rail-to-Rail Output, 125°C, Operational Amplifiers, 6-pin SC-70, Pb-Free", Manufacturer="Texas Instruments", Package Reference=DCK0006A, PackageTopMarking=A78*XTT, PowerWise=N, ComponentLink1Description="Datasheet URL", ComponentLink1URL=http://www.ti.com/general/docs/lit/getliterature.tsp?genericPartNumber=LMV341-N&fileType=pdf, CompType=Amplifiers, PackageDescription="Molded SC-70, 2 x 1.25 x .9mm, 6 Lead, 0.65mm Pitch", PinCount=6, RoHS=Y
U10: library part UCC27519, "Low-Side Gate Driver IC Non-Inverting SOT-23-5"

## Via types
v1: diameter 30, hole 15, Top Layer to Bottom Layer, 153 vias

## Nets (pads, with @x,y where several pads share a name; then routed paths per layer and width w, separated by ;. In a path a pad name is that pad's centre, name@x,y a point inside that pad or via, vN(x,y) a via of type N, cw(c..) or ccw(c..) an arc to the next point about the centre after c; other vN are vias at no path point)
3V3: C10.2 C11.2 C12.2 C13.2 C14.2 C15.2 C24.2 C27.2 C33.2 C34.2 C35.2 L1.1 P4.1 P14.3 TP6.1 U2.19 U2.32 U2.48 U2.64 U5.5 U6.1 U6.8 U7.8 U9.6 | length 6681
  Top Layer w10: P4.1@230,1975 361.57,1975 v1(656.57,1680) ; C13.2@440,922.65 519.72,922.65 U2.64@559.14,962.07 ; L1.1@757.07,512.07 757.07,514.07 789,546 ; v1(767.93,1500) 851.14,1416.79 C14.2@851.14,1277 851.14,1201.79 U2.48@882.07,1170.86 ; U2.19@909.91,666.98 977,599.89 977,566 C12.2@991,552 ; 1025,903 1035.79,903 U2.32@1090.86,847.93 1118.28,875.35 C15.2@1195,875.35 ; 1435,876.65 1445.65,876.65 ; 1554.65,762.65 U7.8@1627.97,762.65 ; C24.2@1857.35,1615 1925,1615 ; 1948.28,928 2015,928 2060,883 ; C27.2@1984.28,1458 1984.92,1457.35 U6.1@1984.92,1371.77 ; P14.3@2015,935 2015,1025.43 2016.57,1027 ; v1(2224.65,1170) U6.8@2224.65,1217.8
  Top Layer w20: L1.1@757.07,512.07 789.15,480 822.07,480 C11.2@858.53,443.53 ; 1230,875.35 1231.29,876.65 1305,876.65 ; C10.2@1369,876.65 1435,876.65 ; C34.2@1424,759.93 C33.2@1496.18,759.93 ; C33.2@1521.35,762.65 1521.35,833
  Top Layer w30: 618.21,903 877,903 ; 789,546 825,582 825,687 877,739 877,714 ; 849,1126.76 849,1085 983,951 983,903 ; 877,745 877,903 ; 1025,903 983,903 ; 877,903 983,903
  Top Layer w55: C15.2@1195,875.35 1230,875.35 ; 1305,876.65 C10.2@1340,876.65 C10.2@1369,876.65 ; C34.2@1399,759.93 C34.2@1424,759.93 ; 1445.65,876.65 1446,877 1513.93,877 1521.35,869.57 ; C33.2@1496.18,759.93 C33.2@1521.35,759.93 1551.93,759.93 ; 1521.35,833 1521.35,869.57 ; 1925,1615 TP6.1@1985,1615 C27.2@1984.28,1458 ; 1948.28,926 1577.78,926 1521.35,869.57 ; 2016.57,1027 2016.92,1027.35 ; 2016.92,1001 2016.92,1027.35 ; 2060,883 2125,818 2125,681 2221,585 3297.33,585 3330.17,617.83 ; 2060,1341 v1(2060,1170) 2016.92,1126.92 C35.2@2016.92,1066.26 2016.92,1027.35
  Bottom Layer w10: v1(656.57,1680) 656.57,1611.36 v1(767.93,1500) ; v1(2060,1170) v1(2224.65,1170)
5V: C2.1 C17.1 C23.2 C25.2 C28.2 C29.2 C30.2 C37.2 P14.1 R16.2 TP2.1 U1.17 U3.5 U5.1 U6.14 U8.8 U10.3 U10.5 | length 5621.7
  Top Layer w10: R16.2@1722.4,2100 1722.4,2167.4 1778.24,2223.24 U3.5@1858.21,2223.24 ; C23.2@1857.35,1918 1923,1918 ; 1858.21,1950.86 1858.21,2030 ; 1858.21,2118.14 1858.21,2191.21 ; 2214,869 2215,870 2215.59,934.99 2216.18,1000 ; U6.14@2225.08,1371.77 2225.08,1465.75 C28.2@2225.35,1466.02 ; 2594,2513.21 2663,2513.21 ; C37.2@2692.61,2513.21 2784.57,2513.21 U10.5@2790.21,2518.85 ; U10.5@2785.21,2552.85 2810.21,2552.85 2825.21,2537.85 2825.21,2492.85 2865.02,2453.05 U10.3@2865.02,2426.85 ; U1.17@2812.06,1482.7 U1.17@2812.06,1492.7 ; 3058,1020.35 C30.2@3125,1020.35 3125,1091.26 3126.37,1092.63 ; 3217,1159.94 3217.41,1160.35 C29.2@3285,1160.35 3347.35,1160.35 3383.99,1196.99 U8.8@3398.59,1196.99
  Top Layer w20: U5.1@1839.4,1809 1839.4,1900.05 C23.2@1857.35,1918 ; 1857.35,1950 1858.21,1950.86
  Top Layer w28: C2.1@2812.06,1348.8 U1.17@2812.06,1482.7
  Top Layer w55: C23.2@1857.35,1918 1857.35,1950 ; 1858.21,2030 C17.1@1858.21,2073 1858.21,2118.14 ; 1858.21,2191.21 U3.5@1858.21,2210 ; 1921,1904 1921,1830 TP2.1@2000.5,1750.5 2158.2,1592.8 2225.08,1592.8 ; 1923,1918 2229.15,1918 2405,2093.85 2405,2374.55 2543.45,2513 2577.79,2513 2578,2513.21 ; 2150,1341 2150,1134.65 2216.21,1068.43 C25.2@2216.21,1066.26 2216.18,1000 ; 2214,869 2214,722.92 2261.92,675 2695,675 3040.35,1020.35 3058,1020.35 ; C28.2@2225.08,1466.02 2225.08,1592.8 ; 2663,2513.21 C37.2@2692.61,2513.21 ; 2758.33,1592.8 2225.08,1592.8 ; 3126.37,1092.63 3193.68,1159.94 3217,1159.94
5V_RESET: C5.1 R16.1 TP3.1 U1.8 U3.2 U5.3 | length 2869.8
  Top Layer w10: TP3.1@1550,2172.06 1572.94,2172.06 R16.1@1645,2100 ; R16.1@1647.6,2100 1702.6,2045 v1(1785,2045) ; U5.3@1764.6,1809 1764.6,1826.63 1645,1946.23 R16.1@1645,2100 ; U3.2@1861.24,2357.88 1768.88,2357.88 1645,2234 R16.1@1645,2100 ; v1(2011,1853) 2068.34,1853 2214.34,1707 2267,1707 2385,1825 2385,1939.28 2642.12,2196.4 2820.83,2196.4 2865,2152.23 2865,2004.07 2824.38,1963.45 C5.1@2817.06,1963.45 C5.1@2812.06,1958.45
  Top Layer w20: U1.8@2812.06,1844.91 C5.1@2812.06,1958.45
  Bottom Layer w10: v1(1785,2045) 1785,2043 1975,1853 v1(2011,1853)
12V: C1.2 C19.1 C20.2 C22.2 P2.6 P12.1 P12.2 Q1.5 R13.1 U1.1 U3.1 U4.7 | length 2731.3
  Top Layer w10: U1.1@3162.06,1844.91 3162.06,1922.06 3186,1946 ; R13.1@3706.73,778.91 3764.91,778.91 3768,782 ; 3812.33,2235 P2.6@3812.33,2165.4 3853.73,2124 3869,2124
  Top Layer w18: U4.7@1379.65,2612.8 1502.44,2612.8 1525,2635.35 C22.2@1575,2635.35 ; 1862,2635.35 C20.2@1862.88,2565 ; U1.1@3162.06,1844.91 U1.1@3162.21,1844.76
  Top Layer w20: U3.1@1861.24,2402.76 C20.2@1861.24,2510
  Top Layer w55: C20.2@1862.88,2565 1863.21,2564.66 C20.2@1863.21,2538 C20.2@1863.21,2511.97 ; 3186,1946 3209.77,1969.77 C1.2@3209.77,2001.4 ; 3768,782 3779,782 3915,918 3915,2078 3869,2124 ; 3812.33,2235 3812.33,2720
  other v1: 1361,2961 1332,3000 1332,3054 1332,3106 1381,3106
12V_BUF: TP34.1 U2.17 U9.3 U9.4 | length 3057.3
  Top Layer w18: U2.17@880.44,635.62 869,624.19 869,575 956,488 956,426.49 990.49,392 1117,392 1158,433 3147,433 TP34.1@3221,507 ; v1(3223,642) 3229,642 3337.92,750.92 U9.4@3426.1,750.92 U9.3@3522.56,750.92
  Bottom Layer w18: TP34.1@3221,507 3223,509 v1(3223,642)
12V_BUF_EN: R12.1 TP33.1 U2.16 U9.5 | length 3144.6
  Top Layer w10: U2.16@767.93,639.14 782,625.07 v1(782,606) ; v1(843,543) 921,465 921,411 973,359 1134.5,359 1172.5,397 3336.93,397 TP33.1@3446.93,507 R12.1@3446.93,614.6 ; U9.5@3426.1,725.33 3453.33,725.33 3464.33,714.33 3464.33,679.34 3446.93,661.94 R12.1@3446.93,627.59
  Bottom Layer w10: v1(782,606) 843,545 v1(843,543)
BOOT0: P5.5 U2.60 | length 593.8
  Top Layer w10: P5.5@230,875 305,950 305,1040 400,1135 497.56,1135 U2.60@614.82,1017.75
CF: C8.2 R15.2 TP30.1 U1.22 | length 512.5
  Top Layer w10: U1.22@3062.06,1438.8 U1.22@3062.06,1482.7 ; TP30.1@3072.06,1155 3137.06,1220 C8.2@3137.06,1273.45 C8.2@3140.02,1276.4
  Top Layer w20: U1.22@3062.06,1438.8 3073.33,1427.54 3073.33,1327.67 3127.55,1273.45 C8.2@3137.06,1273.45 ; C8.2@3140.02,1276.4 R15.2@3257.06,1276.4
CJ125_IA: P2.2 R7.1 R11.2 U1.4 | length 1160.8
  Top Layer w10: U1.4@3012.06,1844.91 3012.06,1787.07 3082.73,1716.4 3207.33,1716.4 3449.38,1958.45 3575.88,1958.45 R11.2@3659.33,1875 R11.2@3658.13,1873.8 ; R7.1@3567.33,1873.8 R11.2@3658.13,1873.8 ; P2.2@3812.33,1765.4 3766.54,1765.4 R11.2@3658.13,1873.8
CJ125_IP: P2.3 R11.1 U1.3 | length 1020.7
  Top Layer w10: U1.3@3062.06,1888.8 U1.3@3062.06,1844.91 3062.06,1779.67 3099.33,1742.4 3195.93,1742.4 3433.53,1980 3629.13,1980 R11.1@3659.33,1949.8 3743.73,1865.4 P2.3@3812.33,1865.4
CJ125_SPI_MISO: TP9.1 U2.35 U6.3 | length 1145.5
  Top Layer w10: U2.35@1063.02,989.91 1152.76,1079.65 1333.3,1079.65 1385,1131.34 v1(1385,1276.4) ; TP9.1@1495,1273.82 1496.18,1275 1725,1275 1770.59,1320.59 U6.3@1984.92,1320.59
  Bottom Layer w10: v1(1385,1276.4) 1493.6,1276.4 TP9.1@1495,1275
CJ125_SPI_MOSI: TP10.1 U2.36 U6.4 | length 1056.9
  Top Layer w10: U2.36@1049.1,1003.83 1146.54,1101.26 1281.26,1101.26 v1(1335,1155) ; TP10.1@1495,1153.82 1496.18,1155 1685,1155 1825,1295 U6.4@1984.92,1295
  Bottom Layer w10: v1@1335,1153.82 TP10.1@1495,1153.82
CJ125_SPI_SCK: TP8.1 U2.34 U6.2 | length 1227.1
  Top Layer w10: U2.34@1076.94,975.99 1157.22,1056.26 1371.26,1056.26 1415,1100 1415,1314.05 1495.95,1395 1725,1395 1773.82,1346.18 U6.2@1984.92,1346.18
CJ125_SPI_SEL: TP11.1 U2.33 U6.5 | length 1021.1
  Top Layer w10: U2.33@1090.86,962.07 1163.79,1035 1644.59,1035 1878.39,1268.8 U6.5@1984.92,1268.8
CJ125_UA: TP19.1 U2.22 U7.1 U7.2 | length 923.2
  Top Layer w10: U2.22@951.67,708.74 981.72,678.69 1136.4,524 1234,524 TP19.1@1265,555 1270.43,549.57 1561.35,549.57 1605.14,593.36 U7.1@1627.97,593.36 1627.97,541.39 1636.35,533.01 1646.35,533.01 1653.56,540.21 U7.2@1653.56,593.36
CJ125_UN: P2.4 R22.1 | length 189
  Top Layer w10: R22.1@3664.73,2065.4 3764.73,1965.4 P2.4@3812.33,1965.4
CJ125_UR: TP17.1 U2.23 U7.6 U7.7 | length 1145.2
  Top Layer w10: U2.23@965.59,722.66 995.62,692.62 1131.2,557 1197,557 1265,625 TP17.1@1265,679.57 1367,577.57 1536.35,577.57 1653.56,694.78 U7.7@1653.56,762.65 1653.56,820.21 1661.35,828.01 1671.35,828.01 1679.15,820.21 U7.6@1679.15,762.65
CJ125_VM: P2.1 R6.1 U1.18 | length 1117.1
  Top Layer w10: U1.18@2862.06,1482.7 2862.06,1523.8 2948.56,1610.3 3278.63,1610.3 R6.1@3367.33,1699 3414.73,1746.4 3731.33,1746.4 P2.1@3812.33,1665.4
CM: C4.1 TP23.1 U1.11 | length 234.6
  Top Layer w10: TP23.1@2530.28,1968.45 C4.1@2613.33,1968.45 ; C4.1@2613.33,1942.67 C4.1@2637.06,1966.4 ; U1.11@2662.06,1844.91 U1.11@2662.06,1893.94
  Top Layer w20: C4.1@2613.33,1942.67 U1.11@2662.06,1893.94